# EAGLE board street light  (EAGLE 9.6.2)
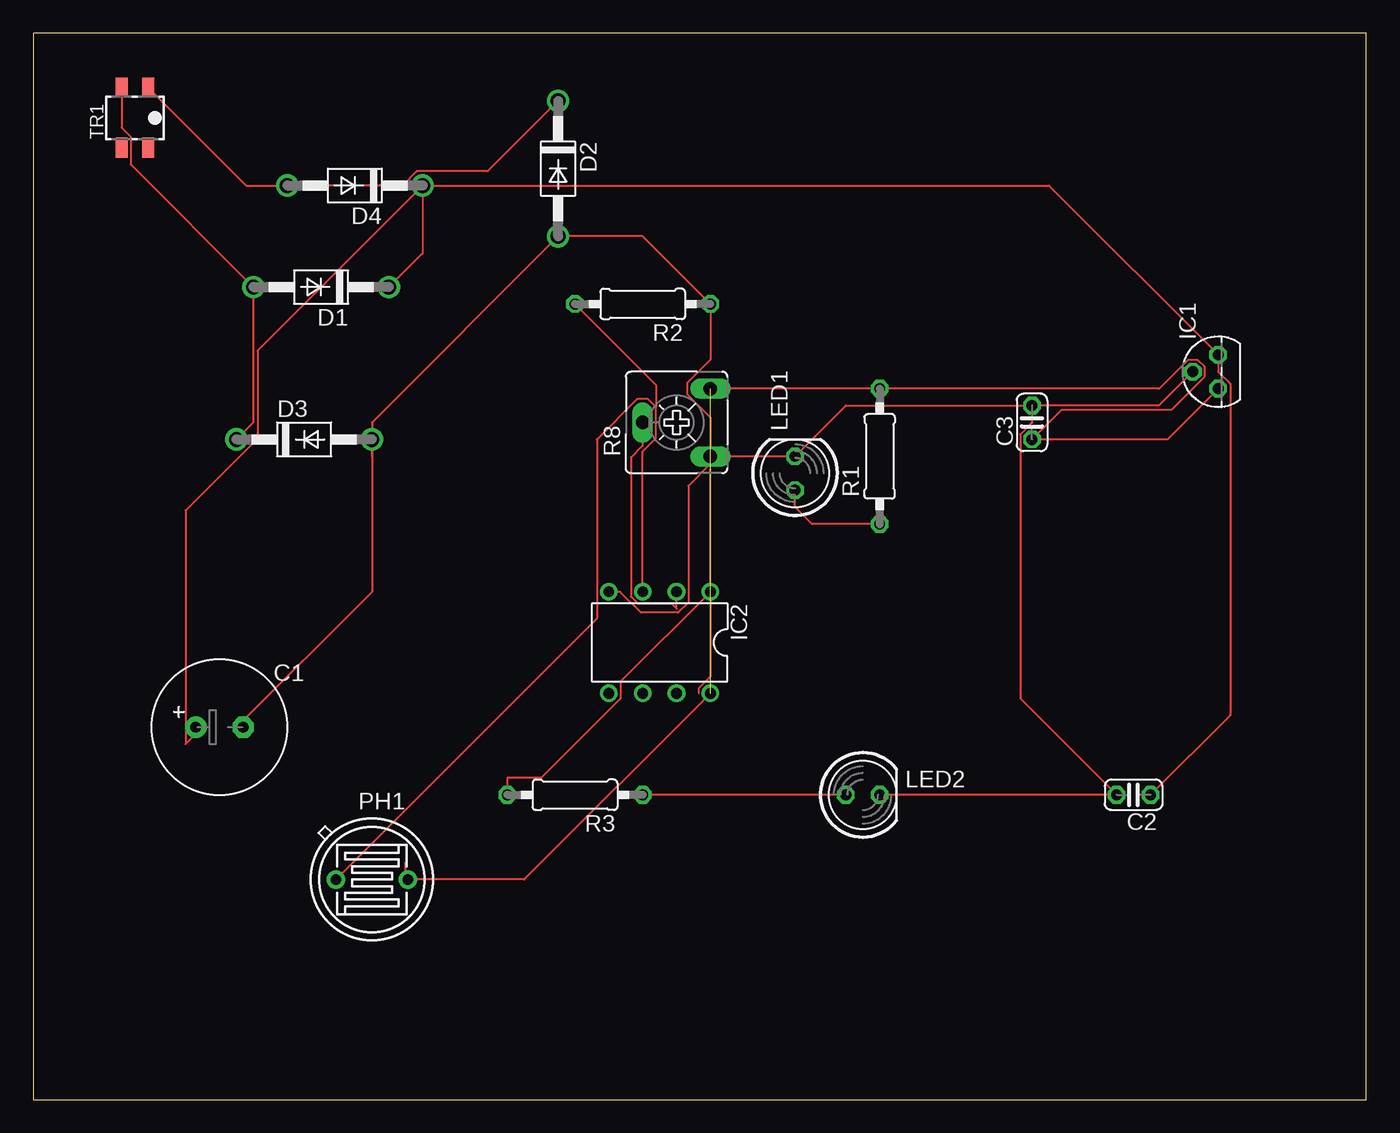
[diagram p0: board, top side]

Size 100 x 80 mm. Coordinates in mm from the lower left corner, seen from the top.
Outline: 0,0 100,0 100,80 0,80 0,0
Copper layers (1*16): Top 0.035mm / dielectric 1.5mm / Bottom 0.035mm
Design rules "default": minimum track width 6mil, minimum drill 0.35mm, track to track 6mil, track to pad 6mil, pad to pad 6mil, via to via 6mil, smd to smd 6mil, copper to edge 40mil, drill to drill 6mil, minimum pad ring 10mil, minimum via ring 8mil, stop-mask expansion 4mil, vias tented up to drill 0mil, thermal gap 10mil

## Footprints (pad centres in the part's own frame; a part is rotated, then mirrored left to right if it is on the bottom)
E3,5-10 = drill 0.813 pad 1.6: + -1.778,0 | drill 0.813 pad 1.6 octagon: - 1.778,0
C025-024X044 = drill 0.813 octagon: 1 -1.27,0; 2 1.27,0
DO41-10 = drill 1.118: A 5.08,0; C -5.08,0
TO92 = drill 0.813 octagon: 1 -1.27,0; 2 0,1.905; 3 1.27,0
DIL08 = drill 0.813 pad 1.27: 1 -3.81,-3.81; 2 -1.27,-3.81; 3 1.27,-3.81; 4 3.81,-3.81; 5 3.81,3.81; 6 1.27,3.81; 7 -1.27,3.81; 8 -3.81,3.81
LED5MM = drill 0.813 octagon: A -1.27,0; K 1.27,0
TO-5_V10 = drill 0.8 pad 1.4: 1 -2.7,0; 2 2.7,0
0207/10 = drill 0.813 octagon: 1 -5.08,0; 2 5.08,0
CA6V = drill 1.016 long: A -2.54,-2.54; E 2.54,-2.54; S 0,2.54
MS35B = smd 1.5 x 0.9: A1 -2.25,1; A2 2.25,-1; E1 -2.25,-1; E2 2.25,1

## Placement (x,y rotation side)
C1  [E3,5-10]  13.97,27.94 0 top
C2  [C025-024X044]  82.55,22.86 180 top
C3  [C025-024X044]  74.93,50.8 90 top
D1  1N4004  [DO41-10]  21.59,60.96 180 top
D2  1N4004  [DO41-10]  39.37,69.85 270 top
D3  1N4004  [DO41-10]  20.32,49.53 0 top
D4  1N4004  [DO41-10]  24.13,68.58 180 top
IC1  7805L  [TO92]  88.9,54.61 90 top
IC2  LM358N  [DIL08]  46.99,34.29 180 top
LED1  [LED5MM]  57.15,46.99 90 top
LED2  [LED5MM]  62.23,22.86 0 top
PH1  V1060_31  [TO-5_V10]  25.4,16.51 180 top
R1  [0207/10]  63.5,48.26 90 top
R2  [0207/10]  45.72,59.69 180 top
R3  [0207/10]  40.64,22.86 180 top
R8  [CA6V]  48.26,50.8 90 top
TR1  [MS35B]  7.62,73.66 90 top

## Library data of the parts
C1-C3 = rcl; SPICEPREFIX: C
D1-D4 = diode
IC1 IC2 = linear
LED1 LED2 = led
PH1 = photo-elements
R1-R3 = rcl; SPICEPREFIX: R
R8 = pot
TR1 = inductor-neosid; OC_FARNELL: unknown; OC_NEWARK: unknown

## Nets
N$1: LED1.A R1.1
N$2: D1.A D3.C TR1.E2
N$3: C3.1 IC1.1 IC2.8 PH1.1 R1.2 R8.E
N$4: D2.C D4.A TR1.A2
N$5: C1.- C2.2 C3.2 D2.A D3.A IC1.2 IC2.4 LED1.K LED2.K R2.1 R8.A
N$6: C1.+ C2.1 D1.C D4.C IC1.3
N$7: IC2.3 PH1.2 R2.2
N$8: LED2.A R3.1
N$9: IC2.2 R8.S
N$11: IC2.1 R3.2

## Tracks (layer width: path | path; a pad name or v marks a point on that pad's centre or on a via)
N$1
  Top 0.152: R1.1 58.42,43.18 57.15,44.45 LED1.A
N$2
  Top 0.152: TR1.E2 6.62,72.93 7.3,72.25 7.3,70.17 D1.A 16.51,50.8 D3.C
N$3  (1 unrouted)
  Top 0.152: IC1.1 85.09,49.53 C3.1 77.17,51.77 85.41,51.77 87.88,54.24 87.88,54.98 87.36,55.5 86.63,55.5 84.47,53.34 R1.2 R8.E | 27.94,17.78 27.94,16.51 PH1.1 36.83,16.51 IC2.8
N$4
  Top 0.152: TR1.A2 15.95,68.58 D4.A 27.7,68.58 28.77,69.65 34.09,69.65 D2.C
N$5  (1 unrouted)
  Top 0.152: C3.2 74.93,50.79 74.04,49.9 74.04,30.1 C2.2 LED2.K | IC1.2 84.45,52.07 C3.2 | C3.2 60.96,52.07 LED1.K R8.A | R8.A 50.8,51.18 49.05,52.93 49.05,53.75 50.8,55.5 R2.1 45.72,64.77 D2.A 25.4,50.8 D3.A | R8.A 50.8,47.7 49.15,46.05 49.15,37.29 48.39,36.52 45.61,36.52 44.03,38.1 IC2.4 | 25.4,48.26 D3.A | D3.A 25.4,38.1 15.24,27.94
N$6
  Top 0.152: C2.1 89.79,28.83 89.79,53.71 88.9,54.6 IC1.3 76.2,68.58 D4.C | D4.C 16.82,56.19 16.82,49.6 11.43,44.21 11.43,26.67 12.19,27.43 C1.+ | D4.C 29.21,63.5 D1.C
N$7
  Top 0.152: R2.2 46.71,53.62 46.71,51.97 | 46.71,51.97 46.71,49.63 45.72,48.64 IC2.3 | 46.71,51.97 46.13,52.55 45.31,52.55 42.29,49.53 42.29,36.1 PH1.2
N$8
  Top 0.152: LED2.A R3.1
N$9
  Top 0.152: R8.S 45.72,49.07 44.83,48.18 44.83,37.73 45.35,37.21 47.88,37.21 48.26,36.83 IC2.2
N$11
  Top 0.152: IC2.1 44.07,31.37 44.07,30.11 38.09,24.13 35.56,24.13 R3.2 | IC2.1 50.8,47.27 | 49.91,30.48 49.91,30.85 50.8,31.74 IC2.1